# Allegro board PCAD SMOKEDETECTORultimasedinta.brd
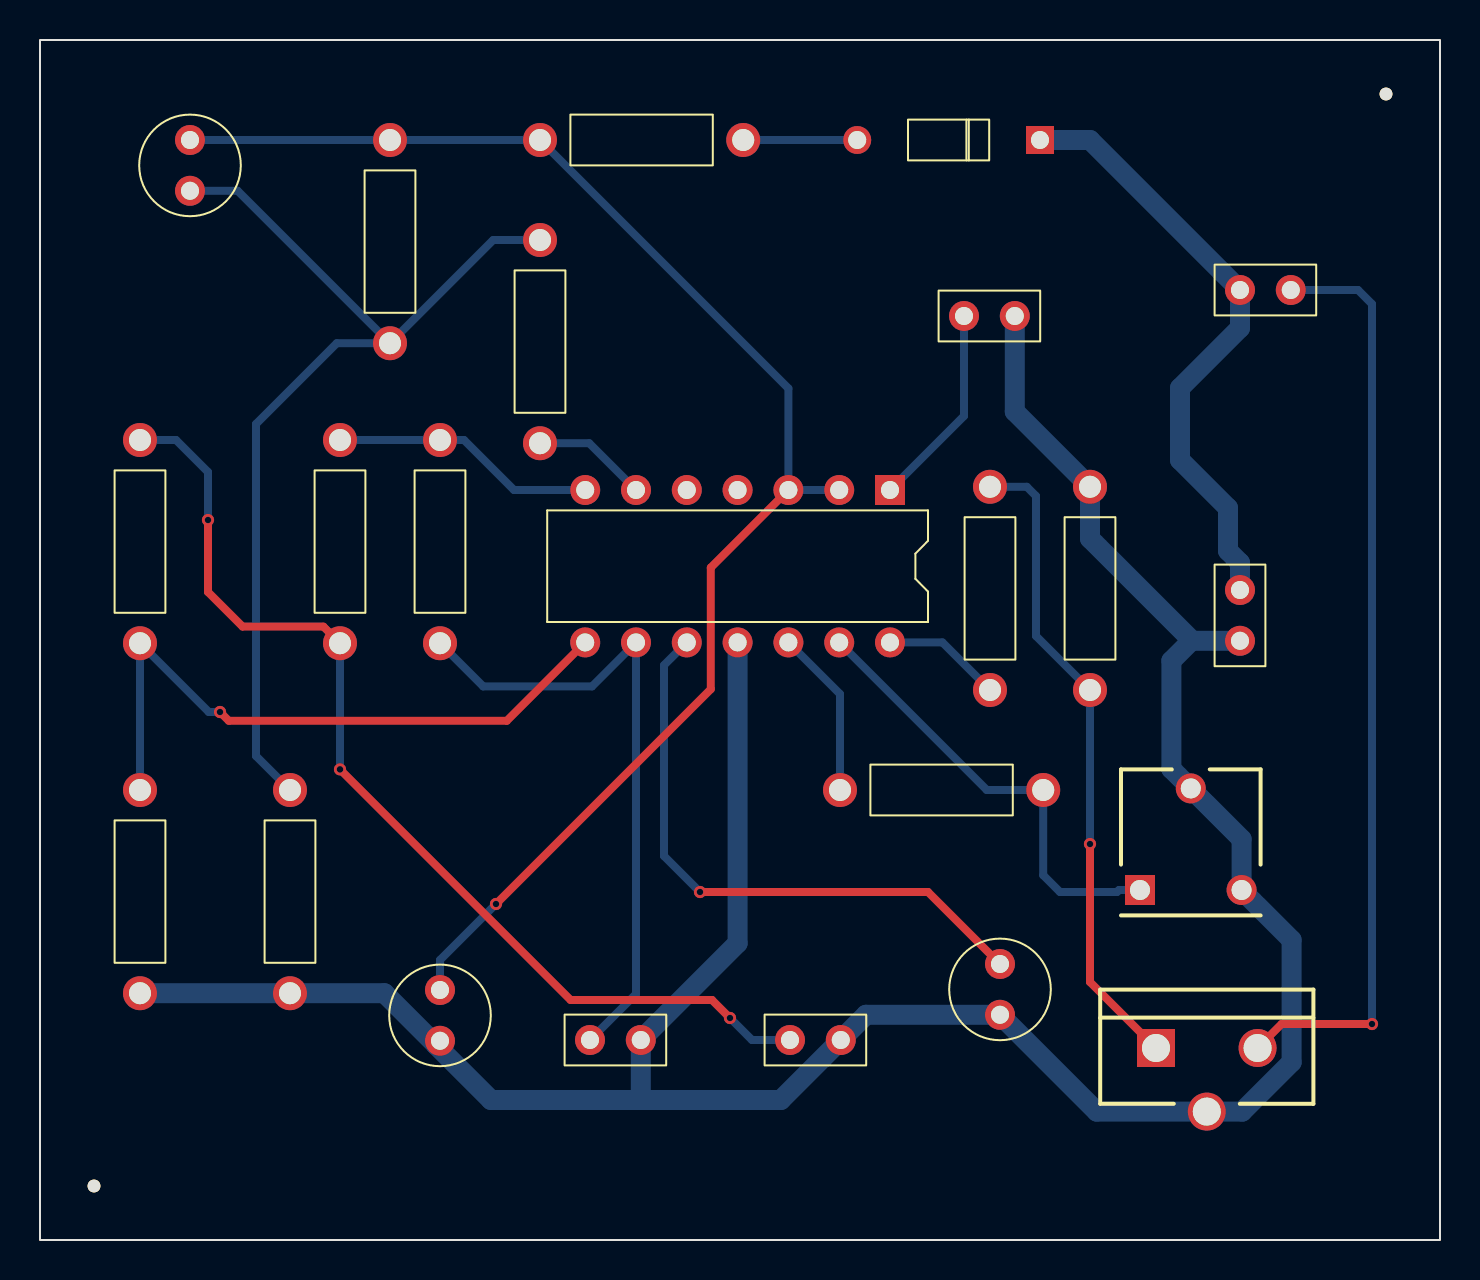
[diagram p0: board, top side]
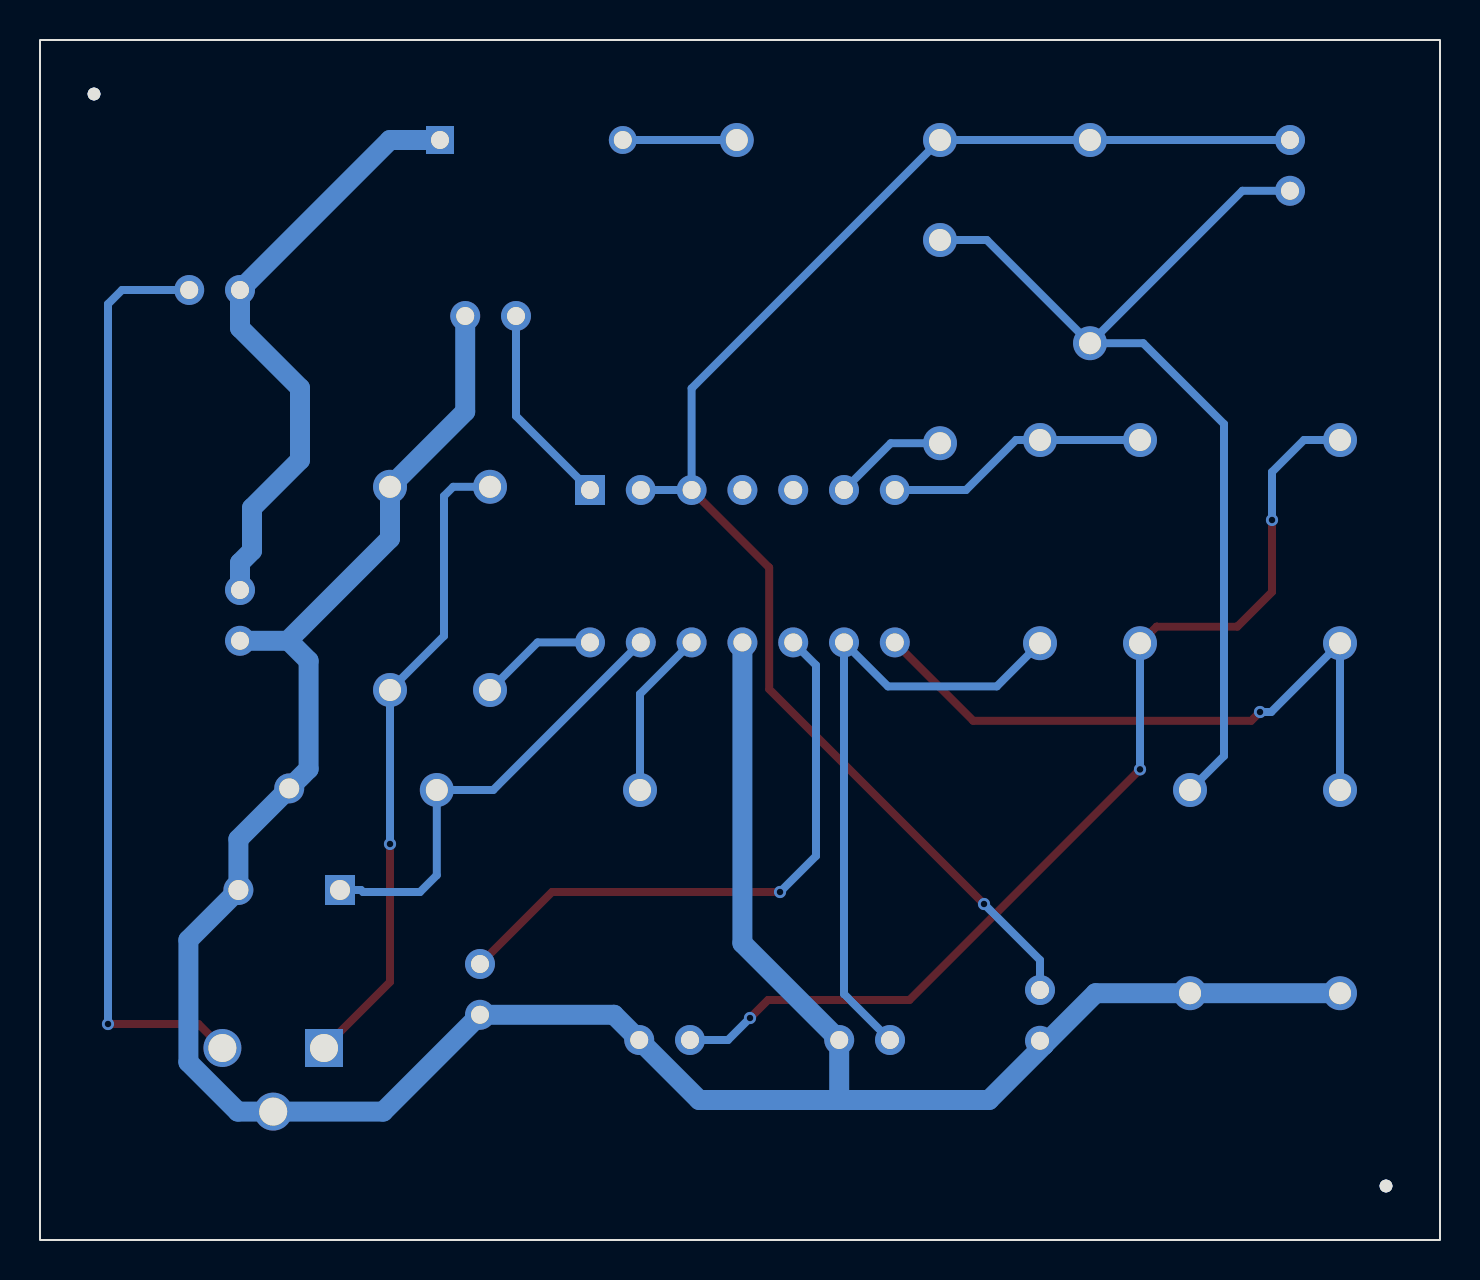
[diagram p1: board, bottom side, seen from below]

Outline 70 x 60 mm; copper layers: TOP, BOTTOM. Coordinates in mm from the lower left corner of the outline.
Outline path: rectangle 0,0 70,60

## Design rules (mm)
constraint set DEFAULT: min track width 0.4

## Placement (name value [footprint] x y rotation side)
C1  100micrF  [CAP196]  20 12.5 180 top
C2  10micrF  [CAP196]  48 13.8 180 top
D1  DIODE  [DO35]  50 55 90 top
D2  LED  [CAP196]  7.5 55 180 top
IC1  LM1801  [DIP14_3]  42.5 37.5 270 top
J1  CON2  [JUMPER2]  60 32.5 270 top
J2  CON2  [JUMPER2]  46.2 46.2 0 top
LDR1  LDR2  [JUMPER2]  27.5 10 0 top
LDR2  LDR1  [JUMPER2]  37.5 10 0 top
LS1  siren  [JUMPER2]  60 47.5 0 top
NOREF  -  [unnamed]  67.3 57.3 0 top
NOREF#2  -  [#2]  70 0 90 top
NOREF#3  -  [#2]  0 60 0 top
NOREF#4  -  [unnamed]  2.7 2.7 0 top
P1  10M  [VRES40]  55 17.5 0 top
R1  6.8K/5W  [RES400]  25 55 270 top
R2  2.2K  [RES400]  17.5 55 180 top
R3  2.2M  [RES400]  25 50 180 top
R4  1M  [RES400]  20 40 180 top
R5  560k  [RES400]  15 40 180 top
R6  3.9M  [RES400]  5 40 180 top
R7  8.2M  [RES400]  5 22.5 180 top
R8  1K  [RES400]  12.5 22.5 180 top
R9  47K  [RES400]  40 22.5 270 top
R10  2.7k  [RES400]  47.5 27.5 0 top
R11  10K  [RES400]  52.5 27.5 0 top
TH1  THC106M  [TO220ABVF2]  55.8 9.6 0 top

## Library data of the parts
C1 C2 = CAPACITOR POL
D1 = DIODE
D2 = LED
IC1 = LM1801_4
J1 J2 = CON2
LDR1 LDR2 = LDR
LS1 = SPEAKER
P1 = POT
R1-R11 = R
TH1 = SCR

## Footprints (pads in the part's own frame, mm; a bottom-side part is the same pattern mirrored in y, then rotated)
CAP196
  round 1.5 hole 0.9: 1(0,0) 2(0,2.54)
DIP14_3
  rect 1.5x1.5 hole 0.9: 1(0,0)
  round 1.5 hole 0.9: 2(0,-2.54) 3(0,-5.08) 4(0,-7.62) 5(0,-10.16) 6(0,-12.7) 7(0,-15.24) 8(7.62,-15.24) 9(7.62,-12.7) 10(7.62,-10.16) 11(7.62,-7.62) 12(7.62,-5.08) 13(7.62,-2.54) 14(7.62,0)
DO35
  rect 1.4x1.4 hole 0.9: 1(0,0)
  round 1.4 hole 0.9: 2(0,9.14)
JUMPER2
  round 1.5 hole 0.9: 1(0,0) 2(2.54,0)
RES400
  round 1.7 hole 1.1: 1(0,0) 2(0,10.16)
TO220ABVF2
  rect 1.9x1.9 hole 1.4: 1(0,0)
  round 1.9 hole 1.4: 2(2.54,-3.18) 3(5.08,0)
unnamed
  round 0.64 hole 3.18 unplated: (0,0)
VRES40
  rect 1.5x1.5 hole 1: 1(0,0)
  round 1.5 hole 1: 2(2.54,5.08) 3(5.08,0)

## Nets
230V AC: D1.1 J1.1 LS1.1
GND: C1.2 C2.2 IC1.11 J1.2 J2.2 LDR1.2 LDR2.2 P1.2(WIPER) P1.3 R7.2 R8.2 R11.2 TH1.2
N00457: IC1.1 J2.1
N00556: LS1.2 TH1.3
N00794: IC1.14 R10.1
N00862: R10.2 R11.1 TH1.1(GATE)
N02898: IC1.7 R4.1 R5.1
N02990: IC1.8 R6.2 R7.1
N03171: LDR2.1 R5.2 R6.1
N03667: IC1.6 R3.2
N03675: C1.1 D2.1 IC1.2 IC1.3 R1.1 R2.1
N03680: D2.2(CATHODE) R2.2 R3.1 R8.1
N06378: D1.2(K) R1.2
N10412: IC1.9(PIN9) LDR1.1 R4.2
N22426: C2.1 IC1.10
N22586: IC1.13 P1.1 R9.2
N23591: IC1.12 R9.1

Pads without a net: IC1 4 5

## Via types
v1: diameter 0.61, hole 0.33, TOP to BOTTOM, 8 vias

## Routing (per net, layer and track width the routed paths; a pad name or vN(x,y) marks a point on that pad's centre or on a via; arc(x,y) is an arc through that point)
230V AC: length 30.6
  BOTTOM w1: J1.1 60,33.86 59.4,34.46 59.4,36.6 57,39 57,42.6 60,45.6 LS1.1 52.5,55 D1.1
GND: length 136.1
  BOTTOM w1: 57.59,29.98 56.57,28.96 56.57,23.55 P1.2 60.08,20.04 P1.3 62.58,15 62.58,8.89 60.11,6.42 TH1.2 52.84,6.42 C2.2 41.3,11.26 LDR2.2 37.04,7 30.04,7 ; 57.59,29.98 57.61,29.96 J1.2 ; 57.59,29.98 52.5,35.07 R11.2 48.74,41.42 J2.2 ; R7.2 R8.2 17.22,12.34 19.8,9.76 ; 19.8,9.76 C1.2 ; 19.8,9.76 19.8,9.75 22.55,7 30.04,7 ; 30.04,7 LDR1.2 34.88,14.84 IC1.11
N00457: length 10.2
  BOTTOM w0.4: J2.1 46.2,41.2 IC1.1
N00556: length 46.6
  TOP w0.4: v1(66.6,10.8) 62.08,10.8 TH1.3
  BOTTOM w0.4: v1(66.6,10.8) 66.6,46.8 65.9,47.5 LS1.2
N00794: length 6
  BOTTOM w0.4: IC1.14 45.12,29.88 R10.1
N00862: length 32.6
  TOP w0.4: TH1.1 52.5,12.9 v1(52.5,19.8)
  BOTTOM w0.4: R10.2 49.34,37.66 49.8,37.2 49.8,30.2 R11.1 v1(52.5,19.8)
N02898: length 13.3
  BOTTOM w0.4: IC1.7 23.7,37.5 21.2,40 R4.1 R5.1
N02990: length 32.8
  TOP w0.4: v1(9,26.4) 9.44,25.96 23.34,25.96 IC1.8
  BOTTOM w0.4: v1(9,26.4) 8.44,26.4 R6.2 R7.1
N03171: length 52.1
  TOP w0.4: v1(15,23.53) 26.53,12 33.6,12 v1(34.5,11.1) ; v1(8.4,36) 8.4,32.4 10.13,30.67 14.17,30.67 R5.2
  BOTTOM w0.4: LDR2.1 35.6,10 v1(34.5,11.1) ; v1(15,23.53) R5.2 ; v1(8.4,36) 8.4,38.4 6.8,40 R6.1
N03667: length 5.8
  BOTTOM w0.4: IC1.6 27.46,39.84 R3.2
N03675: length 74.9
  TOP w0.4: v1(22.8,16.8) 33.54,27.54 33.54,33.62 IC1.3
  BOTTOM w0.4: IC1.2 IC1.3 37.42,42.58 R1.1 R2.1 D2.1 ; C1.1 20,14 v1(22.8,16.8)
N03680: length 50.2
  BOTTOM w0.4: R2.2 14.84,44.84 10.8,40.8 10.8,24.2 R8.1 ; R2.2 9.88,52.46 D2.2 ; R2.2 22.66,50 R3.1
N06378: length 5.7
  BOTTOM w0.4: R1.2 D1.2
N10412: length 32.4
  BOTTOM w0.4: R4.2 22.16,27.68 27.6,27.68 IC1.9 29.8,12.3 LDR1.1
N22426: length 30.2
  TOP w0.4: C2.1 44.4,17.4 v1(33,17.4)
  BOTTOM w0.4: v1(33,17.4) 31.2,19.2 31.2,28.74 IC1.10
N22586: length 22.7
  BOTTOM w0.4: P1.1 53.95,17.5 53.85,17.4 51,17.4 50.16,18.24 R9.2 47.34,22.5 IC1.13
N23591: length 8.4
  BOTTOM w0.4: R9.1 40,27.3 IC1.12

## Text on the board
XSECTION_CHART: *  SURFACE | L1 TOP CONDUCTOR | *  DIELECTRIC | L2 BOTTOM CONDUCTOR | DESIGN CROSS SECTION CHART | ___________________________ | TOTAL THICKNESS 0.264 MM | 1-2 | FIGURE | FINISHED_SIZE | 0.33 | 0.9 | 1.0 | 1.1 | 1.4 | 3.18 | TOOL_SIZE | - | DRILL CHART: TOP to BOTTOM | ALL UNITS ARE IN MILLIMETERS | TOLERANCE_DRILL | +0.0/-0.0 | TOLERANCE_TRAVEL | PLATED | NON-PLATED | QTY | 8 | 2 | 30 | 3 | 22
